# Altium PCB F4baseband.PcbDoc (part 2 of 2)
Units mm, origin at the board's own origin, x right, y up, seen from the top; angles counter-clockwise.
Board outline 50 x 50 mm, 4 copper layers (Top Layer, Internal Plane 1, Signal Layer 1, Bottom Layer), stack 1.642 mm thick; 224 components, 186 nets, 778 pads, 288 vias.
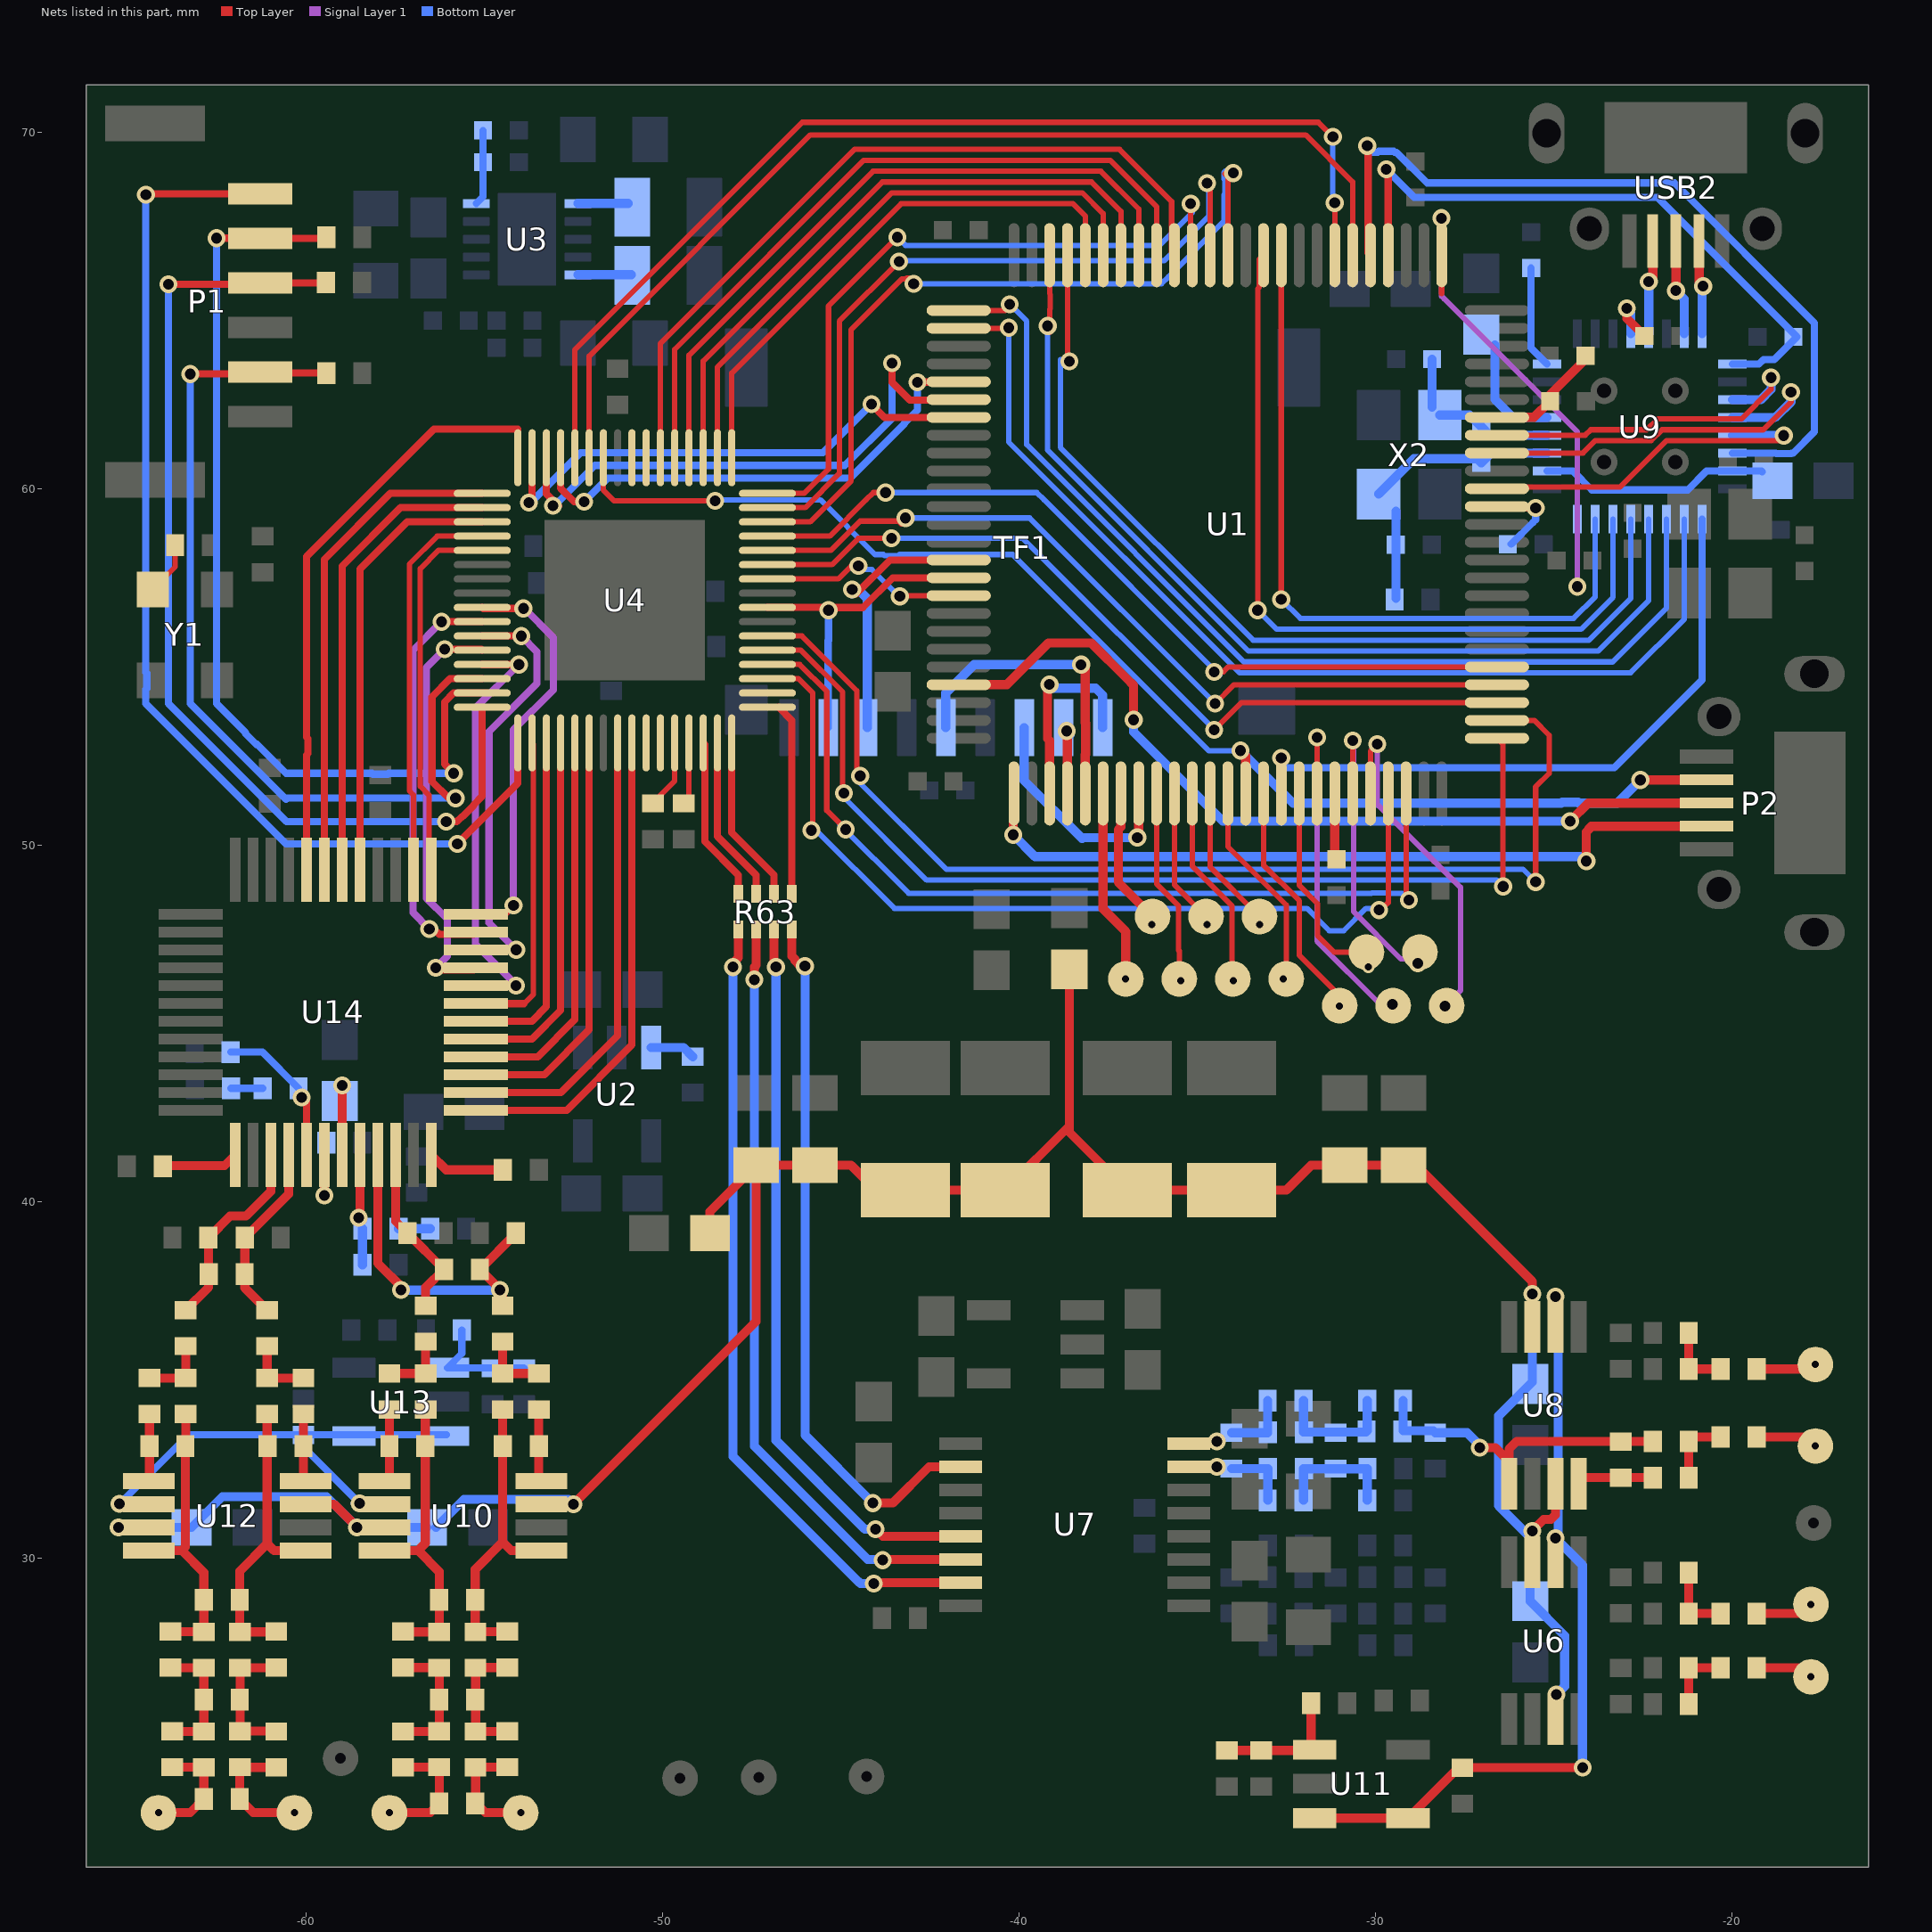
[diagram p4: the nets of this part, all layers, seen from the top]

## Via types
v1: diameter 0.508, hole 0.305, Top Layer to Bottom Layer, 105 vias
v2: diameter 0.5, hole 0.3, Top Layer to Bottom Layer, 91 vias
v3: diameter 0.35, hole 0.2, Top Layer to Bottom Layer, 68 vias
v4: diameter 0.508, hole 0.3, Top Layer to Bottom Layer, 24 vias

## Nets (pads, with @x,y where several pads share a name; then routed paths per layer and width w, separated by ;. In a path a pad name is that pad's centre, name@x,y a point inside that pad or via, vN(x,y) a via of type N, cw(c..) or ccw(c..) an arc to the next point about the centre after c; other vN are vias at no path point) (continued)
NetC45_1: C45.1 C46.2 C48.2 L5.2 L6.1 | length 3.5
  Bottom Layer w0.254: L6.1@-32.012,31.623 -32.012,32.504 -30.226,32.504 L5.2@-30.226,31.623
NetC46_1: C46.1 C49.2 L6.2 U7.7 | length 2.8
  Top Layer w0.254: U7.7@-35.23,32.562 v2@-34.418,32.562 ; v2(-34.442,32.563) v2@-34.418,32.563
  Signal Layer 1 w0.254: v2(-34.442,32.563) v2@-34.417,32.563
  Bottom Layer w0.254: C49.2@-34.036,32.512 C46.1@-33.012,32.512 -33.012,31.631 L6.2@-33.02,31.623
NetC47_1: C47.1 C51.1 C59.1 L7.2 R33.1 U8.5 | length 9.3
  Top Layer w0.254: v2(-27.076,33.096) -26.629,33.096 U8.5@-26.248,32.715 ; U8.5@-26.248,32.09 U8.5@-26.248,32.715 ; R33.1@-22.217,33.274 -26.035,33.274 -26.248,33.061 U8.5@-26.248,32.715
  Bottom Layer w0.254: C51.1@-29.218,34.417 -29.218,33.571 C47.1@-28.372,33.571 ; C47.1@-28.321,33.52 -27.424,33.52 -27,33.096 v2(-27.076,33.096)
NetC48_1: C48.1 C51.2 C52.1 L7.1 L8.2 | length 3.5
  Bottom Layer w0.254: C52.1@-32.012,34.417 -32.012,33.536 -30.261,33.536 L7.1@-30.243,33.553 -30.226,33.571 C51.2@-30.226,34.417
NetC49_1: C49.1 C52.2 L8.1 U7.8 | length 2.8
  Top Layer w0.254: U7.8@-35.23,33.212 -34.479,33.212 -34.417,33.274 v2(-34.442,33.274)
  Bottom Layer w0.254: C49.1@-34.036,33.52 -33.02,33.52 C52.2@-33.02,34.417
NetC57_1: C57.1 R31.2 R32.1 U11.1 | length 3.7
  Top Layer w0.254: C57.1@-34.163,24.605 R32.1@-33.198,24.605 U11.1@-31.722,24.605 ; U11.1@-31.801,24.72 R31.2@-31.801,25.933
NetC59_2: C59.2 R30.1 U8.8 | length 1.9
  Top Layer w0.254: U8.8@-24.13,32.258 C59.2@-23.114,32.258 R30.1@-22.217,32.258
NetC60_1: C60.1 R34.2 R35.1 U13.1 | length 3.4
  Bottom Layer w0.203: R34.2@-55.626,36.398 -55.626,35.743 U13.1@-56.028,35.342 -53.892,35.342 C60.1@-53.873,35.323
NetC62_2: C62.2 R37.2 | length 0.9
  Bottom Layer w0.203: C62.2@-62.103,43.18 R37.2@-61.214,43.18
NetC63_2: C63.2 R39.2 | length 0.9
  Bottom Layer w0.254: R39.2@-57.404,39.243 C63.2@-56.515,39.243
NetC64_1: C64.1 C65.2 C72.2 L9.1 R36.1 U10.4 | length 8.5
  Top Layer w0.254: U10.4@-57.801,30.216 -56.855,30.216 ; C65.2@-57.269,27.932 L9.1@-56.261,27.932 C72.2@-56.261,28.829 -56.261,29.622 -56.855,30.216 ; R36.1@-56.65,34.163 C64.1@-56.65,33.147 -56.65,30.421 -56.855,30.216
NetC64_2: C64.2 R42.1 U10.1 | length 1.9
  Top Layer w0.254: U10.1@-57.658,32.309 C64.2@-57.658,33.147 R42.1@-57.658,34.171
NetC65_1: C65.1 C66.2 C73.2 L9.2 L10.1 | length 3.8
  Top Layer w0.254: L10.1@-57.277,25.138 -56.269,25.138 C66.2@-56.261,25.146 C73.2@-56.261,26.035 L9.2@-56.261,26.924 -56.269,26.932 C65.1@-57.277,26.932
NetC66_1: C66.1 C74.2 L10.2 OQ+.1 | length 3.5
  Top Layer w0.254: v3(-57.658,22.86) -56.515,22.86 C74.2@-56.261,23.114 C66.1@-56.261,24.138 L10.2@-57.269,24.138
NetC69_2: C69.2 U14.43 | length 1.9
  Top Layer w0.254: U14.43@-58.983,41.314 v2(-58.983,43.26)
NetC72_1: C72.1 C75.1 C78.1 L11.2 R50.1 U10.5 | length 8.6
  Top Layer w0.254: R50.1@-54.483,34.171 -54.483,30.455 ; L11.2@-54.356,27.94 -55.253,27.94 C72.1@-55.253,28.829 -55.253,29.685 -54.483,30.455 ; U10.5@-53.401,30.216 -54.245,30.216 -54.483,30.455
NetC73_1: C73.1 C75.2 C76.1 L11.1 L12.2 | length 3.6
  Top Layer w0.254: L12.2@-54.364,25.138 C76.1@-55.245,25.138 -55.237,25.146 -55.237,26.932 L11.1@-54.356,26.932
NetC74_1: C74.1 C76.2 L12.1 OQ-.1 | length 3.3
  Top Layer w0.254: L12.1@-54.356,24.138 -55.237,24.138 -55.237,23.13 -54.967,22.86 v3(-53.975,22.86)
NetC77_1: C77.1 R41.2 R48.2 U14.46 | length 5
  Top Layer w0.254: U14.46@-57.483,41.314 -57.483,39.449 R48.2@-57.15,39.116 -56.134,38.1 -56.642,37.592 R41.2@-56.642,37.084
NetC77_2: C77.2 R43.2 R49.1 U14.45 | length 9.6
  Top Layer w0.254: U14.45@-57.983,41.314 -57.983,38.272 -57.277,37.567 -57.287,37.567 v2(-57.334,37.52) ; R43.2@-54.483,37.084 -54.483,37.465 C77.2@-55.118,38.1 R49.1@-54.11,39.108
  Bottom Layer w0.254: v2(-57.334,37.52) v2(-54.563,37.52)
NetC78_2: C78.2 R44.1 U10.8 | length 1.9
  Top Layer w0.254: U10.8@-53.467,32.233 C78.2@-53.467,33.147 R44.1@-53.467,34.171
NetC79_1: C79.1 C80.2 C82.2 L13.1 R51.1 U12.4 | length 8.3
  Top Layer w0.254: U12.4@-64.405,30.216 -63.484,30.216 ; C80.2@-63.805,27.94 L13.1@-62.873,27.94 ; C79.1@-63.381,33.147 -63.381,30.32 -63.484,30.216 ; C79.1@-63.373,33.155 R51.1@-63.373,34.044 ; L13.1@-62.865,27.932 C82.2@-62.865,28.829 -62.865,29.597 -63.484,30.216
NetC79_2: C79.2 R53.1 U12.1 | length 1.9
  Top Layer w0.254: U12.1@-64.389,32.182 C79.2@-64.389,33.147 R53.1@-64.389,34.044
NetC80_1: C80.1 C81.2 C83.2 L13.2 L14.1 | length 3.7
  Top Layer w0.254: C80.1@-63.881,26.932 -63.873,26.924 L13.2@-62.865,26.924 C83.2@-62.865,26.035 L14.1@-62.865,25.138 C81.2@-63.746,25.138
NetC81_1: C81.1 C84.2 L14.2 OI+.1 | length 3.2
  Top Layer w0.254: v3(-64.135,22.86) -63.246,22.86 C84.2@-62.865,23.241 L14.2@-62.865,24.13 -62.873,24.138 C81.1@-63.754,24.138
NetC82_1: C82.1 C86.1 C88.1 L15.2 R58.1 U12.5 | length 8.6
  Top Layer w0.254: C86.1@-61.857,27.94 C82.1@-61.857,28.829 -61.857,29.634 -61.087,30.404 ; C86.1@-61.849,27.932 L15.2@-60.841,27.932 ; R58.1@-61.087,34.044 -61.087,30.404 ; U12.5@-60.005,30.216 -60.899,30.216 -61.087,30.404
NetC83_1: C83.1 C86.2 C87.1 L15.1 L16.2 | length 3.8
  Top Layer w0.254: C87.1@-60.841,25.146 L16.2@-61.849,25.146 C86.2@-61.849,26.924 L15.1@-60.841,26.924
NetC84_1: C84.1 C87.2 L16.1 OI-.1 | length 3.6
  Top Layer w0.254: C87.2@-60.833,24.13 -61.841,24.13 -61.857,24.114 C84.1@-61.857,23.241 -61.476,22.86 v3(-60.325,22.86)
NetC85_1: C85.1 R52.2 R56.2 U14.39 | length 5.6
  Top Layer w0.254: R52.2@-63.373,36.957 -62.73,37.6 C85.1@-62.73,37.973 -62.73,38.997 -62.128,39.599 -61.679,39.599 -60.983,40.295 U14.39@-60.983,41.314
NetC85_2: C85.2 R54.2 R57.1 U14.40 | length 5.1
  Top Layer w0.254: R54.2@-61.087,36.957 -61.714,37.584 R57.1@-61.714,38.989 -60.483,40.22 U14.40@-60.483,41.314
NetC88_2: C88.2 R55.1 U12.8 | length 1.8
  Top Layer w0.254: U12.8@-60.071,32.233 C88.2@-60.071,33.147 R55.1@-60.071,34.044
NetC96_1: C96.1 C108.2 R61.2 U9.27 X2.3 | length 7.7
  Bottom Layer w0.254: X2.3@-29.905,59.852 -29.905,59.854 -28.917,60.842 -27.137,60.842 R61.2@-27.026,60.731 -26.76,60.997 U9.27@-25.181,60.997 ; C96.1@-29.423,56.929 C108.2@-29.423,58.429 X2.3@-29.423,59.369
NetC110_2: C110.2 R61.1 U9.28 X2.1 | length 4.6
  Bottom Layer w0.254: X2.1@-28.407,62.284 C110.2@-28.407,63.636 ; X2.1@-28.192,62.069 -27.356,62.069 R61.1@-27.026,61.739 -26.784,61.497 U9.28@-25.181,61.497
NetC111_1: C111.1 U9.29 | length 3.2
  Bottom Layer w0.254: C111.1@-26.645,64.033 -26.645,62.509 -26.133,61.997 U9.29@-25.181,61.997
NetC112_1: C112.1 U9.15 U9.26 | length 6.5
  Bottom Layer w0.203: U9.26@-25.181,60.497 -24.455,60.497 -23.927,59.969 -21.234,59.969 -20.706,60.497 U9.15@-19.981,60.497 -19.164,60.497 -19.144,60.477 C112.1@-19.152,60.477
NetI+_1: I+.1 R21.2 | length 1.3
  Top Layer w0.254: R21.2@-19.304,28.448 I+.1@-18.034,28.448
  other v3: -17.78,28.702
NetI-_1: I-.1 R23.2 | length 1.3
  Top Layer w0.254: R23.2@-19.304,26.924 I-.1@-18.034,26.924
  other v3: -17.78,26.67
NetL17_1: L17.1 U3.6 | length 1.4
  Bottom Layer w0.254: U3.6@-52.372,68.005 L17.1@-50.963,68.005
NetL18_1: L18.1 U3.10 | length 1.5
  Bottom Layer w0.254: U3.10@-52.372,66.005 L18.1@-50.868,66.005
NetP2_2: P2.2 U1.76 | length 21.8
  Top Layer w0.254: v1(-40.157,50.292) U1.76@-40.157,51.434 ; v1(-24.079,49.555) -24.079,50.376 -24.003,50.452 -24.003,50.47 -23.942,50.531 P2.2@-20.709,50.531
  Bottom Layer w0.254: v1(-40.157,50.292) -39.548,49.682 -24.206,49.682 v1(-24.079,49.555)
NetP2_3: P2.3 U1.72 | length 24.5
  Top Layer w0.254: U1.72@-41.688,54.504 -40.339,54.504 -39.167,55.677 -37.973,55.677 -36.982,54.686 -36.779,54.483 v1(-36.779,53.518) ; v1(-24.536,50.673) -24.028,51.181 P2.3@-20.709,51.181
  Bottom Layer w0.254: v1(-36.779,53.518) -36.779,53.176 -34.277,50.673 v1(-24.536,50.673)
NetQ+_1: Q+.1 R29.2 | length 1.4
  Top Layer w0.254: R29.2@-19.304,33.401 Q+.1@-17.907,33.401
  other v3: -17.653,33.147
NetQ-_1: Q-.1 R27.2 | length 1.5
  Top Layer w0.254: R27.2@-19.304,35.306 Q-.1@-17.78,35.306
  other v3: -17.653,35.433
NetR2_2: R2.2 R5.2 U1.19 | length 3.4
  Top Layer w0.254: U1.19@-26.588,62.004 -25.55,62.004 R5.2@-25.095,62.459 ; R5.2@-25.174,62.538 R5.2@-25.095,62.459 ; R2.2@-24.105,63.636 -25.095,62.646 R5.2@-25.095,62.459
NetR3_1: R3.1 Y1.1 | length 1.5
  Top Layer w0.152: Y1.1@-64.298,57.18 -63.67,57.809 R3.1@-63.67,58.42
NetR4_1: R4.1 U1.14 | length 2.4
  Top Layer w0.203: U1.14@-26.572,59.489 -26.545,59.461 v1(-25.502,59.461)
  Bottom Layer w0.203: R4.1@-26.187,58.445 -25.576,59.057 -25.502,59.131 v1(-25.502,59.461)
NetR11_1: R11.1 R12.1 U3.5 | length 2.1
  Bottom Layer w0.203: U3.5@-55.223,68.005 -55.034,68.194 R12.1@-55.034,69.163 R11.1@-55.034,70.052
NetR13_2: R13.2 U1.94 | length 1.8
  Top Layer w0.254: R13.2@-31.138,49.654 U1.94@-31.138,51.454
NetR16_2: R16.2 U2.3 | length 1.3
  Bottom Layer w0.254: U2.3@-50.317,44.328 -49.408,44.328 R16.2@-49.149,44.069
NetR20_2: R20.2 R21.1 R22.2 | length 2
  Top Layer w0.254: R22.2@-21.209,29.591 R20.2@-21.209,28.448 R21.1@-20.312,28.448
NetR23_1: R23.1 R24.2 R25.2 | length 1.9
  Top Layer w0.254: R24.2@-21.209,25.908 R25.2@-21.209,26.924 R23.1@-20.312,26.924
NetR26_2: R26.2 R27.1 R28.2 | length 1.9
  Top Layer w0.254: R28.2@-21.209,36.322 R26.2@-21.209,35.306 R27.1@-20.312,35.306
NetR29_1: R29.1 R30.2 R33.2 | length 2
  Top Layer w0.254: R30.2@-21.209,32.258 R33.2@-21.209,33.274 -21.082,33.401 R29.1@-20.312,33.401
NetR36_2: R36.2 R41.1 R42.2 | length 1.9
  Top Layer w0.254: R42.2@-57.658,35.179 R36.2@-56.642,35.179 R41.1@-56.642,36.076
NetR37_1: R37.1 R38.1 U14.41 | length 4
  Top Layer w0.203: v2(-60.122,42.926) -59.983,42.787 U14.41@-59.983,41.314
  Bottom Layer w0.203: R38.1@-62.111,44.196 -61.222,44.196 R37.1@-60.206,43.18
NetR39_1: R39.1 R40.1 U14.44 | length 2.9
  Top Layer w0.254: v2(-58.522,39.548) -58.51,39.536 -58.483,39.536 U14.44@-58.483,41.314
  Signal Layer 1 w0.254: v2@-58.522,39.497 v2(-58.522,39.548)
  Bottom Layer w0.254: R40.1@-58.412,38.227 R39.1@-58.412,39.243
NetR43_1: R43.1 R44.2 R50.2 | length 1.9
  Top Layer w0.254: R43.1@-54.483,36.076 R50.2@-54.483,35.179 R44.2@-53.467,35.179
NetR45_1: R45.1 U14.48 | length 2.2
  Top Layer w0.254: U14.48@-56.483,41.314 -56.063,40.894 R45.1@-54.475,40.894
NetR46_1: R46.1 U14.37 | length 2
  Top Layer w0.254: R46.1@-63.881,41.013 -62.283,41.013 U14.37@-61.983,41.314
NetR47_1: R47.1 U14.42 | length 2.6
  Top Layer w0.254: v2(-59.483,40.179) U14.42@-59.483,41.314
  Bottom Layer w0.254: v2(-59.483,40.179) R47.1@-59.483,41.601
NetR51_2: R51.2 R52.1 R53.2 | length 1.9
  Top Layer w0.254: R53.2@-64.389,35.052 R51.2@-63.373,35.052 R52.1@-63.373,35.949
NetR54_1: R54.1 R55.2 R58.2 | length 1.9
  Top Layer w0.254: R54.1@-61.087,35.949 R58.2@-61.087,35.052 R55.2@-60.071,35.052
NetR60_2: R60.2 U9.4 | length 1.8
  Top Layer w0.254: v4(-22.947,65.064) -22.947,64.781 R60.2@-22.454,64.287
  Bottom Layer w0.254: v4(-22.947,65.064) -22.962,65.049 -22.831,64.918 U9.4@-22.831,64.347
NetR62_2: R62.2 U9.32 | length 2.9
  Bottom Layer w0.203: R62.2@-25.629,66.192 -25.629,63.945 U9.32@-25.181,63.497
NetR63_5: R63.5 U7.15 | length 22.7
  Top Layer w0.254: v1(-48.021,46.584) -48.021,46.695 -47.867,46.848 R63.5@-47.867,47.633 ; v1@-44.069,29.312 U7.15@-41.63,29.312
  Bottom Layer w0.254: v1(-48.021,46.584) -48.021,32.857 -44.488,29.324 ; -44.483,29.329 -44.44,29.286 v1(-44.069,29.286)
NetR63_6: R63.6 U7.14 | length 21.6
  Top Layer w0.254: v1(-47.422,46.228) -47.422,46.58 -47.367,46.635 R63.6@-47.367,47.633 ; v1@-43.819,29.962 U7.14@-41.63,29.962
  Bottom Layer w0.254: v1(-47.422,46.228) -47.422,33.147 -47.418,33.143 -44.237,29.962 v1@-43.819,29.962
  other v1: -43.819,29.947
NetR63_7: R63.7 U7.13 | length 20.7
  Top Layer w0.254: R63.7@-46.867,47.633 -46.867,46.635 v1(-46.816,46.584) ; v1(-44.018,30.81) -43.82,30.612 U7.13@-41.63,30.612
  Bottom Layer w0.254: v1(-46.816,46.584) -46.816,33.303 -44.323,30.81 v1(-44.018,30.81)
NetR63_8: R63.8 U7.10 | length 20
  Top Layer w0.254: R63.8@-46.367,47.633 -46.367,46.889 -46.282,46.805 -46.282,46.764 -46.128,46.609 v1(-45.999,46.609) ; v1(-44.094,31.547) -43.536,31.547 -42.52,32.562 U7.10@-41.63,32.562
  Bottom Layer w0.254: -45.999,33.858 -45.999,33.452 v1(-44.094,31.547) ; -45.999,33.88 v1(-45.999,46.609)
NetR64_1: R64.1 U1.29 U9.9 | length 18
  Top Layer w0.203: U1.29@-29.638,66.554 v1@-29.638,68.906
  Bottom Layer w0.203: v1(-29.693,68.961) -28.905,68.174 -22.081,68.174 -18.169,64.262 -18.804,63.627 -19.108,63.627 -19.238,63.497 U9.9@-19.981,63.497
NetT1_1: T1.1 U1.81 | length 5.5
  Top Layer w0.254: U1.81@-37.638,51.454 -37.638,48.216 -37,47.578 T1.1@-37,46.25
  other v3: -37.008,46.253
NetT2_1: T2.1 U1.82 | length 3.9
  Top Layer w0.254: U1.82@-37.138,51.454 -37.138,50.51 -37.211,50.437 -37.211,48.961 T2.1@-36.25,48
  other v3: -36.271,47.777
NetT3_1: T3.1 U1.84 | length 5.5
  Top Layer w0.152: U1.84@-36.138,51.454 -36.138,48.918 -35.521,48.302 -35.521,47.053 -35.5,47.032 T3.1@-35.5,46.25
  other v3: -35.458,46.203
NetT4_1: T4.1 U1.85 | length 3.8
  Top Layer w0.152: U1.85@-35.638,51.454 -35.638,48.888 T4.1@-34.75,48
  other v3: -34.722,47.777
NetT5_1: T5.1 U1.86 | length 5.6
  Top Layer w0.152: U1.86@-35.138,51.454 -35.138,49.418 -34.021,48.302 T5.1@-34.021,46.271
  other v3: -33.985,46.203
NetT6_1: T6.1 U1.87 | length 4
  Top Layer w0.152: U1.87@-34.638,51.454 -34.638,49.388 T6.1@-33.25,48
  other v3: -33.249,47.777
NetT7_1: T7.1 U1.88 | length 5.9
  Top Layer w0.152: U1.88@-34.138,51.454 -34.138,49.962 -32.5,48.324 T7.1@-32.5,46.25
  other v3: -32.588,46.253
NetT8_1: T8.1 U1.96 | length 9.9
  Top Layer w0.152: U1.96@-30.138,51.454 -30.138,52.641 v2(-29.947,52.832)
  Signal Layer 1 w0.152: v2(-29.947,52.832) -29.947,51.156 -27.61,48.819 -27.61,45.923 v2(-28.042,45.491)
NetT9_1: T9.1 U1.95 | length 8.8
  Top Layer w0.152: U1.95@-30.638,51.454 v2(-30.638,52.939)
  Signal Layer 1 w0.152: v2(-30.638,52.939) -30.607,52.908 -30.607,48.133 -29.286,46.812 -28.804,46.812 v2(-28.804,46.685)
NetT10_1: T10.1 U1.93 | length 10.1
  Top Layer w0.152: U1.93@-31.638,51.454 v2(-31.638,53.021)
  Signal Layer 1 w0.152: v2(-31.638,53.021) -31.638,47.309 -29.87,45.542 v2(-29.515,45.542)
NetT11_1: T11.1 U1.92 | length 5.8
  Top Layer w0.152: U1.92@-32.138,51.454 -32.138,48.876 -31.623,48.362 -31.623,47.473 -31.15,47 T11.1@-30.25,47
  other v3: -30.201,46.584
NetT12_1: T12.1 U1.90 | length 6.8
  Top Layer w0.152: U1.90@-33.138,51.454 -33.138,49.444 -32.131,48.438 -32.131,46.911 -31,45.78 T12.1@-31,45.5
  other v3: -31.013,45.491
NetU1_15: U1.15 U9.13 | length 10.1
  Top Layer w0.152: U1.15@-26.546,60.046 -23.136,60.046 -21.831,61.351 -18.684,61.351 v1(-18.542,61.493)
  Top Layer w0.254: v1(-18.542,61.493) v1@-18.542,61.519
  Bottom Layer w0.254: U9.13@-19.981,61.497 -18.546,61.497 v1(-18.542,61.493)
NetU1_17: U1.17 U9.12 | length 11.2
  Top Layer w0.152: U1.17@-26.588,61.004 -24.177,61.004 -23.831,61.351 -22.262,61.351 -21.957,61.656 -19.116,61.656 -18.339,62.433 v1(-18.339,62.713)
  Bottom Layer w0.254: U9.12@-19.981,61.997 -18.792,61.997 -18.763,62.027 -18.745,62.027 -18.339,62.433 v1(-18.339,62.713)
NetU1_18: U1.18 U9.11 | length 10.1
  Top Layer w0.152: U1.18@-26.588,61.504 -24.108,61.504 -23.957,61.656 -22.388,61.656 -22.083,61.961 -19.726,61.961 -18.898,62.789 v1(-18.898,63.119)
  Bottom Layer w0.254: U9.11@-19.981,62.497 -19.189,62.497 -18.898,62.789 v1(-18.898,63.119)
NetU1_26: U1.26 U9.24 | length 17
  Top Layer w0.152: v1(-28.143,67.589) -28.143,65.481 -28.138,65.476 U1.26@-28.138,66.554
  Signal Layer 1 w0.152: v1(-28.143,67.589) -28.143,65.405 -28.067,65.329 -24.331,61.592 v1(-24.331,57.254)
  Bottom Layer w0.152: v1(-24.331,57.254) U9.24@-24.331,59.147
NetU1_30: U1.30 U9.14 | length 23.4
  Top Layer w0.203: v1@-30.201,69.596 -30.201,66.617 U1.30@-30.138,66.554
  Bottom Layer w0.203: v1(-30.226,69.621) -30.226,69.469 -30.197,69.44 -29.932,69.44 -29.903,69.469 -29.482,69.469 -29.453,69.44 -29.409,69.44 -28.549,68.58 -21.61,68.58 -17.678,64.648 -17.678,61.595 -18.276,60.997 -18.32,60.997 -18.332,60.985 -18.752,60.985 -18.764,60.997 U9.14@-19.981,60.997
NetU1_35: U1.35 U9.23 | length 21.1
  Top Layer w0.152: v1(-32.639,56.896) -32.639,66.403 -32.563,66.479 U1.35@-32.614,66.53
  Bottom Layer w0.152: v1(-32.639,56.896) -32.106,56.363 -24.435,56.363 -23.831,56.967 U9.23@-23.831,59.147
NetU1_36: U1.36 U9.22 | length 22.8
  Top Layer w0.152: v1(-33.299,56.591) -33.299,65.607 -33.259,65.647 -33.259,66.433 U1.36@-33.138,66.554
  Bottom Layer w0.152: v1(-33.299,56.591) -32.766,56.058 -24.232,56.058 -23.331,56.959 U9.22@-23.331,59.147
NetU1_47: U1.47 U9.21 | length 26.7
  Top Layer w0.152: U1.47@-38.638,66.554 -38.638,63.775 -38.583,63.72 v1(-38.583,63.576)
  Bottom Layer w0.152: v1(-38.583,63.576) -38.786,63.576 -38.837,63.627 -38.837,61.158 -33.432,55.753 -24.003,55.753 -22.831,56.925 U9.21@-22.831,59.147
NetU1_48: U1.48 U9.20 | length 27.9
  Top Layer w0.152: v1(-39.192,64.567) -39.192,64.447 -39.138,64.393 -39.138,65.031 -39.116,65.053 -39.116,65.452 -39.138,65.474 U1.48@-39.138,66.554
  Bottom Layer w0.152: v1(-39.192,64.567) -39.192,61.082 -33.558,55.448 -23.749,55.448 -22.331,56.867 U9.20@-22.331,59.147
NetU1_51: U1.51 U9.19 | length 29.3
  Top Layer w0.152: U1.51@-41.688,65.004 -40.38,65.004 -40.259,65.126 v1(-40.259,65.176)
  Bottom Layer w0.152: v1(-40.259,65.176) -40.253,65.176 -39.78,64.704 -39.78,61.239 -33.684,55.143 -23.343,55.143 -21.831,56.655 U9.19@-21.831,59.147
NetU1_52: U1.52 U9.18 | length 29.8
  Top Layer w0.152: U1.52@-41.688,64.504 -40.245,64.504 -40.257,64.516 v1(-40.284,64.516)
  Bottom Layer w0.152: v1(-40.284,64.516) -40.284,61.312 -33.811,54.839 -22.835,54.839 -21.331,56.343 U9.18@-21.331,59.147
NetU1_91: U1.91 U9.17 | length 17.8
  Top Layer w0.203: U1.91@-32.638,52.275 v1(-32.638,52.45)
  Bottom Layer w0.203: v1(-32.638,52.45) -32.638,52.221 -32.588,52.172 -23.292,52.172 -20.831,54.633 U9.17@-20.831,59.147
NetU9_5: U9.5 USB2.4 | length 2.6
  Top Layer w0.254: v4(-22.327,65.811) -22.215,65.923 USB2.4@-22.215,66.946
  Bottom Layer w0.254: U9.5@-22.331,64.347 -22.327,64.351 v4(-22.327,65.811)
NetU9_7: U9.7 USB2.3 | length 2.7
  Top Layer w0.254: v4(-21.565,65.557) USB2.3@-21.565,66.946
  Bottom Layer w0.254: v4(-21.565,65.557) -21.331,65.323 U9.7@-21.331,64.347
NetU9_8: U9.8 USB2.2 | length 2.8
  Top Layer w0.254: USB2.2@-20.915,66.946 -20.915,65.796 v4(-20.803,65.684)
  Bottom Layer w0.254: U9.8@-20.831,64.347 -20.831,65.585 -20.93,65.684 v4(-20.803,65.684)
PC8: TF1.7 U1.65 | length 7.7
  Top Layer w0.203: v1@-44.57,57.048 -43.614,58.004 U1.65@-41.688,58.004
  Bottom Layer w0.254: v1(-44.679,57.175) -44.679,57.056 -44.697,57.074 -44.552,57.219 -44.25,56.918 TF1.7@-44.25,53.298
PC9: TF1.8 U1.66 U4.40 | length 9
  Top Layer w0.203: U4.40@-47.054,56.671 v1@-45.266,56.671 ; v1@-45.263,56.667 -44.376,56.667 -43.539,57.504 U1.66@-41.688,57.504
  Bottom Layer w0.203: TF1.8@-45.35,53.298 -45.35,55.742 -45.339,55.753 v1(-45.339,56.591)
PC10: TF1.1 U1.78 | length 5.6
  Top Layer w0.254: U1.78@-39.138,51.454 -39.138,52.931 -39.192,52.986 -39.192,54.399 v1@-39.138,54.454
  Bottom Layer w0.254: v1(-39.141,54.508) -39.141,54.407 -37.846,54.407 -37.65,54.211 TF1.1@-37.65,53.298
PC11: TF1.2 U1.79 | length 2
  Top Layer w0.254: U1.79@-38.638,51.454 v1@-38.638,53.186
  Bottom Layer w0.254: TF1.2@-38.75,53.298 v1(-38.659,53.207) TF1.2@-38.557,53.105
PC12: TF1.5 U1.80 | length 8.6
  Top Layer w0.254: U1.80@-38.138,51.454 -38.138,52.538 -38.125,52.55 -38.125,53.428 -38.138,53.44 v4@-38.138,54.952
  Bottom Layer w0.254: TF1.5@-42.05,53.298 -42.05,54.266 -41.25,55.067 v4(-38.252,55.067)
PD2: TF1.3 U1.83 | length 6.6
  Top Layer w0.254: v1@-36.638,50.23 U1.83@-36.638,51.454
  Bottom Layer w0.254: TF1.3@-39.85,53.298 -39.85,51.814 -38.227,50.19 -38.202,50.216 v1(-36.678,50.216)
PIN1: U4.1 U14.19 | length 13.9
  Top Layer w0.203: U14.19@-59.483,49.314 -59.483,58.018 -57.63,59.871 U4.1@-55.054,59.871
PIN2: U4.2 U14.18 | length 13.1
  Top Layer w0.203: U14.18@-58.983,49.314 -58.983,57.832 -57.344,59.471 U4.2@-55.054,59.471
PIN3: U4.3 U14.17 | length 12.4
  Top Layer w0.203: U14.17@-58.483,49.314 -58.483,57.748 -57.16,59.071 U4.3@-55.054,59.071
PIN4: U4.4 U14.14 | length 11
  Top Layer w0.152: U14.14@-56.983,49.314 -56.983,51.411 -57.099,51.527 -57.099,57.887 -56.315,58.671 U4.4@-55.054,58.671
PIN5: U4.5 U14.13 | length 10.5
  Top Layer w0.152: U14.13@-56.483,49.314 -56.547,49.378 -56.547,51.407 -56.794,51.653 -56.794,57.76 -56.283,58.271 U4.5@-55.054,58.271
PIN9: U4.9 U14.12 | length 11.5
  Top Layer w0.203: U14.12@-55.233,48.064 -54.425,48.064 v1(-54.178,48.311) ; U4.9@-55.054,56.671 -55.025,56.642 v1(-53.899,56.642)
  Signal Layer 1 w0.203: v1(-54.178,48.311) -54.178,53.238 -53.061,54.356 -53.061,55.829 -53.873,56.642 v1(-53.899,56.642)
PIN10: U4.10 U14.11 | length 11.7
  Top Layer w0.203: v1(-56.54,47.65) -56.413,47.65 -56.261,47.498 -55.298,47.498 U14.11@-55.233,47.564 ; v1(-56.194,56.271) U4.10@-55.054,56.271
  Signal Layer 1 w0.203: v1(-56.54,47.65) -56.998,48.108 -56.998,55.467 v1(-56.194,56.271)
PIN11: U4.11 U14.10 | length 12.1
  Top Layer w0.203: U14.10@-55.233,47.064 -55.23,47.066 v1(-54.102,47.066) ; U4.11@-55.054,55.871 v1(-53.959,55.871)
  Signal Layer 1 w0.203: v1(-54.102,47.066) -54.864,47.828 -54.864,53.188 -53.518,54.534 -53.518,55.429 v1(-53.959,55.871)
PIN12: U4.12 U14.9 | length 11.8
  Top Layer w0.203: v1(-56.358,46.564) -56.317,46.564 -56.261,46.507 -55.289,46.507 U14.9@-55.233,46.564 ; v1(-56.109,55.499) -55.082,55.499 U4.12@-55.054,55.471
  Signal Layer 1 w0.203: v1(-56.358,46.564) -56.032,46.889 -56.032,47.93 -56.617,48.514 -56.617,54.991 v1(-56.109,55.499)
PIN13: U4.13 U14.8 | length 11
  Top Layer w0.203: U4.13@-55.054,55.071 -55.051,55.067 v1(-54.026,55.067)
  Signal Layer 1 w0.203: v1(-54.108,46.064) -54.128,46.064 -54.108,46.083 -55.245,47.22 -55.245,53.848 v1(-54.026,55.067)
PIN18: U4.18 U14.7 | length 8.8
  Top Layer w0.152: -53.878,45.556 -53.619,45.814 -53.619,52.836 U4.18@-53.654,52.871
  Top Layer w0.203: U14.7@-55.233,45.564 -55.233,45.556 -53.878,45.556
PIN19: U4.19 U14.6 | length 9.5
  Top Layer w0.203: U14.6@-55.233,45.064 -53.661,45.064 -53.254,45.471 U4.19@-53.254,52.871
PIN20: U4.20 U14.5 | length 10.2
  Top Layer w0.203: U14.5@-55.233,44.564 -53.658,44.564 -52.854,45.368 U4.20@-52.854,52.871
PIN21: U4.21 U14.4 | length 11
  Top Layer w0.203: U14.4@-55.233,44.064 -53.498,44.064 -52.454,45.107 U4.21@-52.454,52.871
PIN22: U4.22 U14.3 | length 11.7
  Top Layer w0.203: U14.3@-55.233,43.564 -53.312,43.564 -52.054,44.822 U4.22@-52.054,52.871
PIN23: U4.24 U14.2 | length 12.9
  Top Layer w0.203: U14.2@-55.233,43.064 -52.847,43.064 -51.254,44.656 U4.24@-51.254,52.871
PIN25: U4.25 U14.1 | length 13.6
  Top Layer w0.203: U14.1@-55.233,42.564 -52.686,42.564 -50.854,44.396 U4.25@-50.854,52.871
PIN26: U4.26
PIN27: U4.27
PIN28: R7.1 U4.28 | length 1.9
  Top Layer w0.152: R7.1@-50.267,51.191 -49.654,51.804 U4.28@-49.654,52.871
PIN29: R15.1 U4.29 | length 1.5
  Top Layer w0.152: R15.1@-49.254,51.322 U4.29@-49.254,52.871
PIN30: R63.4 U4.30 | length 4.6
  Top Layer w0.203: U4.30@-48.854,52.871 -48.81,52.826 -48.81,50.105 -47.867,49.162 R63.4@-47.867,48.633
PIN31: R63.3 U4.31 | length 4.7
  Top Layer w0.203: U4.31@-48.454,52.871 -48.454,50.252 -47.367,49.165 R63.3@-47.367,48.633
PIN32: R63.2 U4.32 | length 4.7
  Top Layer w0.203: U4.32@-48.054,52.871 -48.054,50.355 -46.867,49.168 R63.2@-46.867,48.633
PIN33: R63.1 U4.33 | length 5.4
  Top Layer w0.203: U4.33@-46.733,53.871 -46.367,53.504 R63.1@-46.367,48.633
PIN34: U4.34
PIN35: U1.97 U4.35 | length 26.2
  Top Layer w0.152: U4.35@-47.054,54.671 -46.178,54.671 -45.781,54.274 -45.781,50.515 -45.822,50.474 v1(-45.822,50.419) ; v1(-29.896,48.184) -29.845,48.184 -29.638,48.391 U1.97@-29.638,51.454
  Bottom Layer w0.152: v1(-45.822,50.419) -45.766,50.419 -45.726,50.46 -43.493,48.227 -31.917,48.227 -31.289,47.6 -30.89,47.6 -30.263,48.227 -29.888,48.227 -29.888,48.192 v1(-29.896,48.184)
PIN36: U1.98 U4.36 | length 26
  Top Layer w0.152: U4.36@-47.054,55.071 -46.147,55.071 -45.39,54.314 -45.39,50.976 v1(-44.856,50.442) ; U1.98@-29.138,51.454 -29.138,48.543 v1(-29.058,48.463)
  Bottom Layer w0.152: v1@-45.034,50.597 -43.09,48.653 -30.109,48.653 -30.096,48.666 -29.696,48.666 -29.682,48.653 -29.247,48.653 v1(-29.058,48.463)
PIN37: U1.1 U4.37 | length 29.5
  Top Layer w0.152: U4.37@-47.054,55.471 -46.116,55.471 -44.945,54.3 -44.945,51.383 -44.907,51.421 v1(-44.907,51.46) ; U1.1@-26.588,53.004 -26.416,52.833 v1(-26.416,48.844)
  Bottom Layer w0.152: v1(-44.907,51.46) -44.907,51.345 -42.584,49.022 -26.594,49.022 v1(-26.416,48.844)
PIN38: U1.2 U4.38 | length 32
  Top Layer w0.152: U4.38@-47.054,55.871 -46.085,55.871 -44.545,54.331 -44.545,51.835 v1@-44.438,51.943 ; U1.2@-26.588,53.504 -25.539,53.504 -25.121,53.086 -25.121,52.019 -25.502,51.638 v1(-25.502,48.971)
  Bottom Layer w0.152: v1@-44.545,51.835 -42.037,49.327 -25.857,49.327 v1(-25.502,48.971) ; v1(-44.45,51.943) -44.437,51.943 v1@-44.412,51.918
PIN42: U1.67 U4.42 | length 6.1
  Top Layer w0.152: U4.42@-47.054,57.471 -45.066,57.471 -44.701,57.836 v1(-44.501,57.836) v1@-44.583,57.836 ; v1(-43.341,56.984) -43.37,56.984 -43.39,57.004 U1.67@-41.688,57.004
  Bottom Layer w0.152: v1(-44.501,57.836) -44.425,57.76 -44.425,57.734 -44.12,57.734 -43.37,56.984 v1(-43.341,56.984)
PIN43: U1.3 U4.43 | length 23.3
  Top Layer w0.152: U4.43@-47.054,57.871 -45.242,57.871 -44.502,58.611 v1(-43.574,58.611) ; v1(-34.519,53.238) -33.753,54.004 U1.3@-26.588,54.004
  Bottom Layer w0.152: v1(-43.574,58.611) -39.891,58.611 v1(-34.519,53.238)
PIN44: U1.4 U4.44 | length 23.4
  Top Layer w0.152: U4.44@-47.054,58.271 -45.273,58.271 -44.45,59.093 -43.374,59.093 -43.291,59.011 -43.224,59.011 -43.18,59.055 v1(-43.18,59.182) ; v1(-34.493,53.975) -33.964,54.504 U1.4@-26.588,54.504
  Bottom Layer w0.152: v1(-43.18,59.182) -39.7,59.182 v1(-34.493,53.975)
PIN45: U1.5 U4.45 | length 23.5
  Top Layer w0.152: U4.45@-47.054,58.671 -45.304,58.671 -44.285,59.69 -44.081,59.893 v1(-43.739,59.893) ; v1(-34.519,54.864) -34.265,54.864 -34.124,55.004 U1.5@-26.588,55.004
  Bottom Layer w0.152: v1(-43.739,59.893) -39.497,59.893 -39.294,59.69 -34.366,54.762 -34.468,54.864 v1(-34.519,54.864)
PIN46: U1.38 U4.46 | length 23.2
  Top Layer w0.152: U4.46@-47.054,59.071 -45.857,59.071 -44.704,60.223 -44.704,64.465 -43.278,65.891 -43.161,65.891 -43.139,65.913 -42.97,65.913 -42.951,65.894 v1(-42.951,65.751) ; U1.38@-34.138,66.554 -34.138,68.76 -34.214,68.836 -34.19,68.859 v1(-33.985,68.859)
  Bottom Layer w0.152: v1(-42.951,65.751) -36.001,65.751 -35.805,65.948 -34.249,67.504 -34.249,68.244 -34.22,68.273 -34.22,68.672 -34.239,68.692 -34.239,68.774 -34.249,68.783 -34.249,68.871 -34.214,68.906 -34.167,68.859 v1(-33.985,68.859)
PIN47: U1.39 U4.47 | length 21.3
  Top Layer w0.152: U4.47@-47.054,59.471 -45.99,59.471 -45.034,60.427 -45.034,64.701 v1(-43.361,66.374) ; v1(-34.722,68.574) -34.722,68.492 -34.638,68.408 U1.39@-34.638,66.554
  Bottom Layer w0.152: v1(-43.361,66.374) -43.334,66.401 -35.917,66.401 -34.675,67.643 -34.675,68.445 -34.722,68.492 v1(-34.722,68.574)
PIN48: U1.40 U4.48 | length 19.4
  Top Layer w0.152: U4.48@-47.054,59.871 -46.021,59.871 -45.339,60.553 -45.339,65.126 v1(-43.409,67.056) ; v1(-35.179,67.996) -35.179,67.183 U1.40@-35.128,67.132
  Bottom Layer w0.152: v1@-43.582,67.056 v1(-43.409,67.056) -43.18,66.827 -36.057,66.827 -35.128,67.756 -35.179,67.806 v1(-35.179,67.996)
PIN49: U1.46 U4.49 | length 15.5
  Top Layer w0.152: U4.49@-48.054,60.871 -48.054,63.249 -43.307,67.996 -38.481,67.996 -38.138,67.652 U1.46@-38.138,66.554
PIN50: U1.45 U4.50 | length 16.8
  Top Layer w0.152: U4.50@-48.454,60.871 -48.454,63.414 -43.568,68.301 -38.22,68.301 -37.638,67.718 U1.45@-37.638,66.554
PIN51: U1.44 U4.51 | length 18.1
  Top Layer w0.152: U4.51@-48.854,60.871 -48.854,63.58 -43.829,68.605 -37.959,68.605 -37.138,67.784 U1.44@-37.138,66.554
PIN52: U1.43 U4.52 | length 19.4
  Top Layer w0.152: U4.52@-49.254,60.871 -49.254,63.746 -44.09,68.91 -37.698,68.91 -36.638,67.849 U1.43@-36.638,66.554
PIN53: U1.42 U4.53 | length 20.7
  Top Layer w0.152: U4.53@-49.654,60.871 -49.654,63.912 -44.351,69.215 -37.437,69.215 -36.138,67.915 U1.42@-36.138,66.554
PIN54: U1.41 U4.54 | length 21.9
  Top Layer w0.152: U4.54@-50.054,60.871 -50.054,64.077 -44.611,69.52 -37.177,69.52 -35.714,68.057 -35.714,66.63 U1.41@-35.638,66.554
PIN55: U4.55
PIN56: U4.56
PIN58: P2.4 U1.89 U4.58 | length 37.1
  Top Layer w0.152: U4.58@-51.654,60.871 -51.654,59.96 -51.359,59.665 v2(-48.514,59.665)
  Top Layer w0.254: v1(-33.782,52.654) -33.638,52.51 U1.89@-33.638,51.454 ; v1(-22.566,51.831) P2.4@-20.709,51.831
  Bottom Layer w0.152: v2(-48.514,59.665) -48.514,59.69 -45.568,59.69 -44.035,58.157 -43.802,58.157 -43.773,58.128 -43.374,58.128 -43.345,58.157 -40.174,58.157 -34.671,52.654 v1(-33.782,52.654)
  Bottom Layer w0.254: v1(-33.782,52.654) -32.309,51.181 -24.783,51.181 -24.757,51.206 -24.315,51.206 -24.29,51.181 -23.216,51.181 v1(-22.566,51.831)
PIN59: U1.31 U4.59 | length 29.4
  Top Layer w0.152: U4.59@-52.054,60.871 -52.054,63.719 -45.847,69.926 -31.953,69.926 -30.638,68.611 U1.31@-30.638,66.554
PIN60: U1.32 U4.60 | length 30.5
  Top Layer w0.152: U4.60@-52.454,60.871 -52.454,63.903 -46.076,70.282 -31.598,70.282 v1@-31.115,69.799 ; U1.32@-31.138,66.554 v1@-31.138,68.018
  Bottom Layer w0.152: v1@-31.191,68.021 v1(-31.191,69.875)
  other v1: -31.14,68.021
PIN61: U1.55 U4.61 | length 14.1
  Top Layer w0.203: U4.61@-52.854,60.871 -52.854,60.017 -52.476,59.639 v2(-52.197,59.639) ; v2(-42.85,62.992) -41.777,62.992 -41.752,62.967 U1.55@-41.701,63.017
  Bottom Layer w0.203: v2(-52.197,59.639) -51.537,60.3 -44.735,60.3 -43.273,61.761 -43.205,61.829 -43.205,61.849 -42.85,62.205 v2(-42.85,62.992)
PIN62: U1.56 U4.62 | length 16.3
  Top Layer w0.203: U4.62@-53.254,60.871 -53.254,59.858 v2@-52.919,59.523 ; v2(-53.073,59.523) v2@-52.919,59.523 ; v2@-52.908,59.512 v2@-52.919,59.523 ; v2(-43.561,63.525) -43.561,62.99 -43.059,62.488 U1.56@-41.704,62.488
  Bottom Layer w0.203: v2(-53.073,59.523) -53.026,59.523 -51.894,60.655 -44.882,60.655 -43.561,61.976 v2(-43.561,63.525)
PIN63: U1.57 U4.63 | length 14.8
  Top Layer w0.203: v2(-53.746,59.614) -53.696,59.614 -53.654,59.655 U4.63@-53.654,60.871 ; v2(-44.133,62.37) -43.767,62.004 U1.57@-41.688,62.004
  Signal Layer 1 w0.203: v2(-53.746,59.614) v2@-53.721,59.639
  Bottom Layer w0.203: v2(-53.746,59.614) -53.695,59.614 -52.298,61.011 -45.491,61.011 v2(-44.133,62.37) v2@-44.053,62.45
PIN64: U4.64 U14.20 | length 17
  Top Layer w0.203: U14.20@-59.983,49.314 -59.983,52.532 -59.944,52.571 -59.944,52.992 -59.983,53.03 -59.983,58.102 -56.411,61.674 -54.054,61.674 U4.64@-54.054,60.871
TCK: P1.3 R10.2 U4.16 | length 29.1
  Top Layer w0.203: v1(-63.856,65.735) P1.3@-61.329,65.735 ; P1.3@-61.288,65.776 R10.2@-59.446,65.776 ; v1(-56.065,50.66) -55.766,50.66 -55.753,50.673 -55.651,50.775 -55.644,50.775 -55.606,50.813 -55.593,50.813 -55.296,51.11 -55.296,51.13 -55.054,51.372 U4.16@-55.054,53.871
  Bottom Layer w0.203: v1(-63.856,65.735) -63.856,53.975 -60.554,50.673 -60.541,50.66 v1(-56.065,50.66)
TDI: P1.2 R9.1 U4.15 | length 27.2
  Top Layer w0.203: v1(-62.509,67.031) P1.2@-61.293,67.031 ; P1.2@-61.288,67.026 R9.1@-59.458,67.026 ; v1(-55.855,52.019) -56.108,52.273 -56.108,54.017 -55.855,54.271 U4.15@-55.054,54.271 U4.15@-54.762,54.271
  Bottom Layer w0.203: v1(-62.509,67.031) -62.509,53.975 -61.697,53.162 -61.697,53.13 -61.399,52.832 -61.366,52.832 -60.554,52.019 -58.148,52.019 -58.122,51.994 -57.702,51.994 -57.676,52.019 v1(-55.855,52.019)
TDO: P1.1 U4.17 | length 31.4
  Top Layer w0.203: v1(-64.491,68.25) -64.464,68.276 P1.1@-61.288,68.276 ; v1(-55.753,50.038) -54.054,51.737 U4.17@-54.054,52.871
  Bottom Layer w0.203: v1(-64.491,68.25) -64.491,54.846 -64.465,54.82 -64.465,54.4 -64.491,54.374 -64.491,53.975 -60.554,50.038 v1(-55.753,50.038)
TMS: P1.5 R6.1 U4.14 | length 26.5
  Top Layer w0.203: v1(-63.246,63.221) P1.5@-61.343,63.221 ; P1.5@-61.318,63.246 R6.1@-59.428,63.246 ; v1(-55.804,51.321) -55.994,51.321 -56.464,51.79 -56.464,54.165 -55.958,54.671 U4.14@-55.054,54.671
  Bottom Layer w0.203: v1(-63.246,63.221) -63.246,53.975 -60.554,51.283 -60.515,51.321 v1(-55.804,51.321)
VAMP: C21.2 C22.2 C23.2 C24.2 C25.2 C26.2 C27.2 C89.1 C90.1 C91.1 C92.1 C95.2 R18.1 R19.2 U6.3 U6.7 U8.3 U8.7 U10.3 U10.7 U12.3 U12.7 | length 78
  Top Layer w0.254: v2(-65.258,30.866) U12.3@-64.405,30.866 ; U12.7@-60.005,31.516 -59.217,31.516 v2(-58.567,30.866) U10.3@-57.801,30.866 ; U10.7@-53.401,31.516 v2(-52.497,31.516) -47.371,36.642 C95.2@-47.371,41.021 ; R19.2@-48.666,39.116 -48.666,39.726 C95.2@-47.371,41.021 ; R18.1@-38.583,46.521 -38.583,42.125 ; U6.3@-25.598,29.886 v2(-25.598,30.765) -25.277,31.086 -25.074,31.086 -24.948,31.211 U8.7@-24.948,32.09 ; U8.3@-25.598,36.49 v2(-25.598,37.414) -25.598,37.765 -28.854,41.021 C26.2@-29.21,41.021 C27.2@-30.861,41.021 -31.801,41.021 -32.5,40.322 C24.2@-34.036,40.322 C21.2@-36.957,40.322 -38.583,41.948 -38.583,42.125 ; U6.7@-24.933,26.162 v2(-24.925,26.169) ; C95.2@-47.371,41.021 C25.2@-45.72,41.021 -44.704,41.021 -44.005,40.322 C22.2@-43.18,40.322 C23.2@-40.386,40.322 -38.583,42.125
  Bottom Layer w0.254: v2(-65.258,30.866) C92.1@-63.212,30.866 ; C92.1@-63.207,30.861 -62.343,31.725 -59.426,31.725 v2(-58.567,30.866) C91.1@-56.608,30.866 ; C91.1@-56.351,30.861 -55.564,31.648 -52.629,31.648 v2(-52.497,31.516) ; v2(-25.598,37.414) -25.598,34.942 C90.1@-25.654,34.886 -26.543,33.997 -26.543,31.471 -25.654,30.582 C89.1@-25.654,28.79 -24.689,27.825 -24.689,26.406 v2(-24.925,26.169)
VREF: C58.1 U6.2 U8.2 U11.3 U11.4 | length 23.2
  Top Layer w0.254: U11.3@-31.704,22.708 U11.4@-29.083,22.708 C58.1@-27.669,24.122 ; C58.1@-27.559,24.122 v2(-24.189,24.122) ; U6.2@-24.948,29.886 -24.948,30.637 -24.943,30.631 v2(-24.943,30.556) ; U8.2@-24.948,36.49 -24.948,37.333 v2(-24.943,37.338)
  Signal Layer 1 w0.254: v2(-24.943,30.556) v2@-24.943,30.642
  Bottom Layer w0.254: v2@-24.867,37.262 -24.867,30.632 v2(-24.943,30.556) -24.189,29.802 v2(-24.189,24.122)
VREF2: C61.1 U10.2 U12.2 U13.3 U13.4 | length 14.5
  Top Layer w0.203: v2(-65.227,31.521) -65.232,31.516 U12.2@-64.405,31.516 ; v2(-58.491,31.539) -58.595,31.539 -58.618,31.516 U10.2@-57.801,31.516
  Signal Layer 1 w0.203: v2@-58.641,31.539 v2(-58.491,31.539)
  Bottom Layer w0.203: v2(-65.227,31.521) -63.289,33.46 C61.1@-60.071,33.46 ; v2(-58.491,31.539) -60.071,33.119 C61.1@-60.071,33.46 ; U13.3@-56.061,33.46 C61.1@-60.071,33.46
pads on no net: TF1.9 U1.7 U1.8 U1.9 U1.16 U1.23 U1.24 U1.25 U1.33 U1.34 U1.37 U1.53 U1.54 U1.58 U1.59 U1.60 U1.61 U1.62 U1.63 U1.64 U1.68 U1.69 U1.70 U1.71 U1.77 U2.4 U5.4 U9.3 U9.10 U14.23 U14.24 U14.25 U14.26 U14.27 U14.28 U14.29 U14.30 U14.31 U14.32 U14.33 U14.34 U14.35 U14.36

## Polygon pours and split planes (outlines as drawn)
GND on Internal Plane 1 (split plane): -16.677,44.3 -18.88,44.3 -21.568,46.987 -21.601,47.01 -21.641,47.017 -42.299,47.017 -44.885,49.603 -44.918,49.626 -44.958,49.634 -65.657,49.634 -65.657,70.826 -16.677,70.826
AGND on Internal Plane 1 (split plane): -42.415,46.841 -42.381,46.818 -42.342,46.81 -21.684,46.81 -18.996,44.123 -18.979,44.112 -18.963,44.1 -18.923,44.092 -16.677,44.092 -16.677,21.846 -65.657,21.846 -65.657,49.426 -45.001,49.426

## Keep-outs
Keep-Out Layer:
  the board outline again, w0.5

## Other copper
Internal Plane 1 (plane layer: these items are gaps in the copper):
  lines w0.203: -66.167,49.53 -44.958,49.53 -42.342,46.914 -21.641,46.914 -18.923,44.196 -16.167,44.196

## Silkscreen, mask and mechanical layers (free items; w line width, h text height)
Top Overlay:
  text "DBG" at -24.13,47.65 h1

## Text inside footprints (layer, text, board x,y; h text height)
R63: Mechanical 1 "R1" at -47.316,47.953 h0.3